# EAGLE board MotorShield-v0.01 (EAGLE 9.6.0)
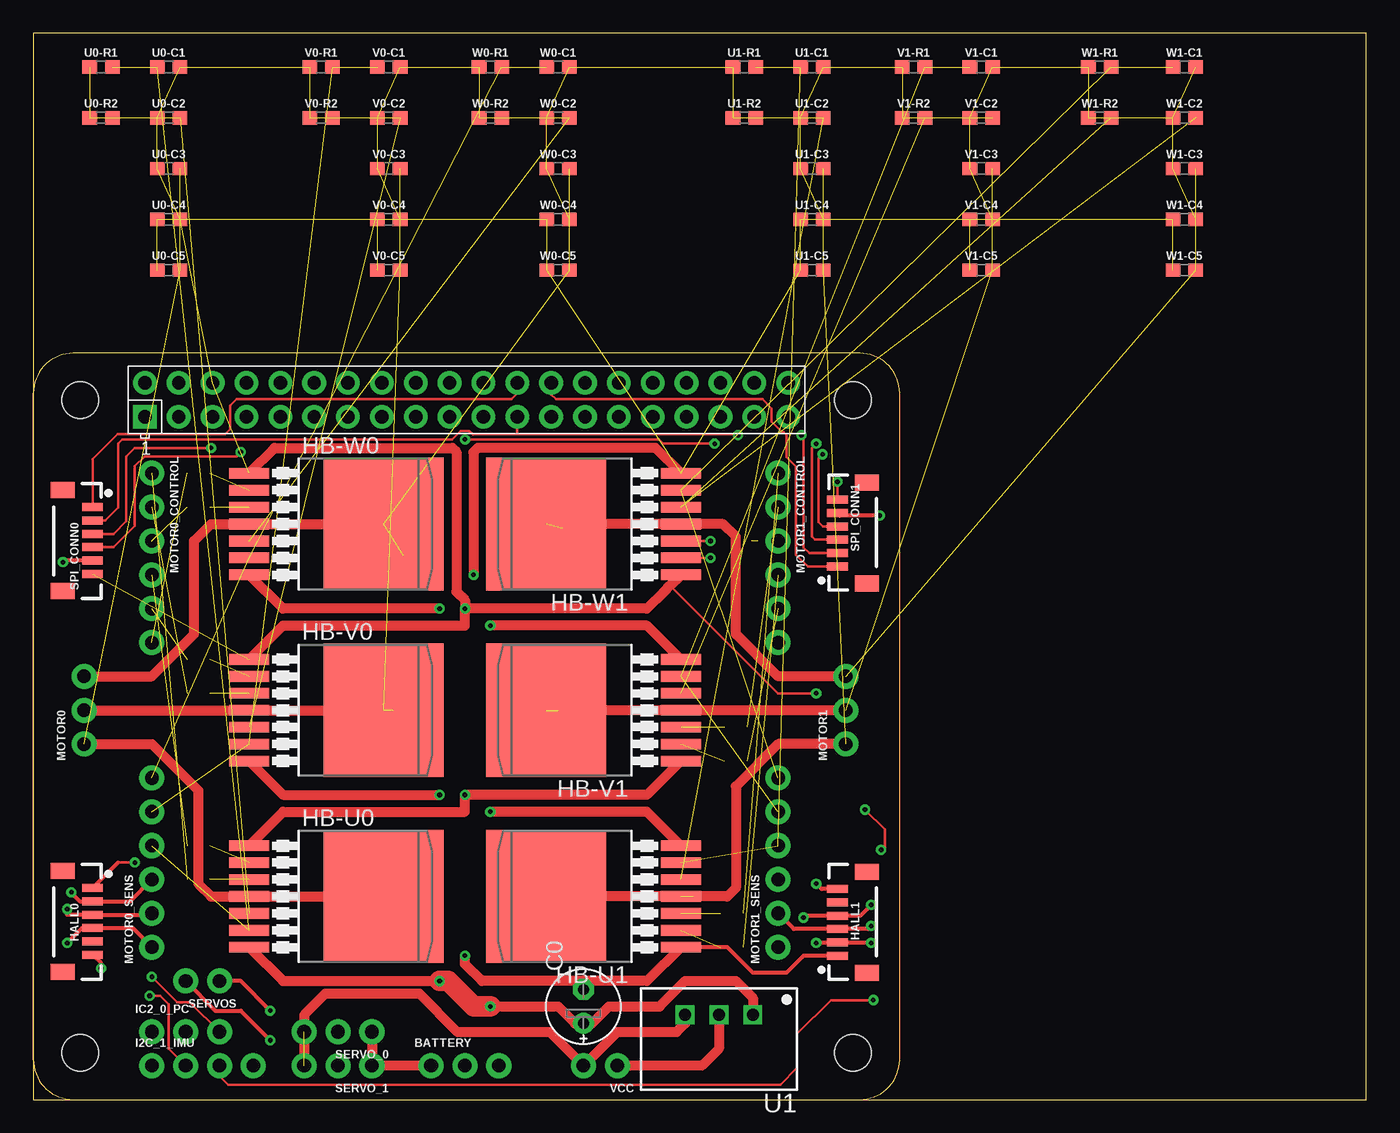
[diagram p0: board, top side]
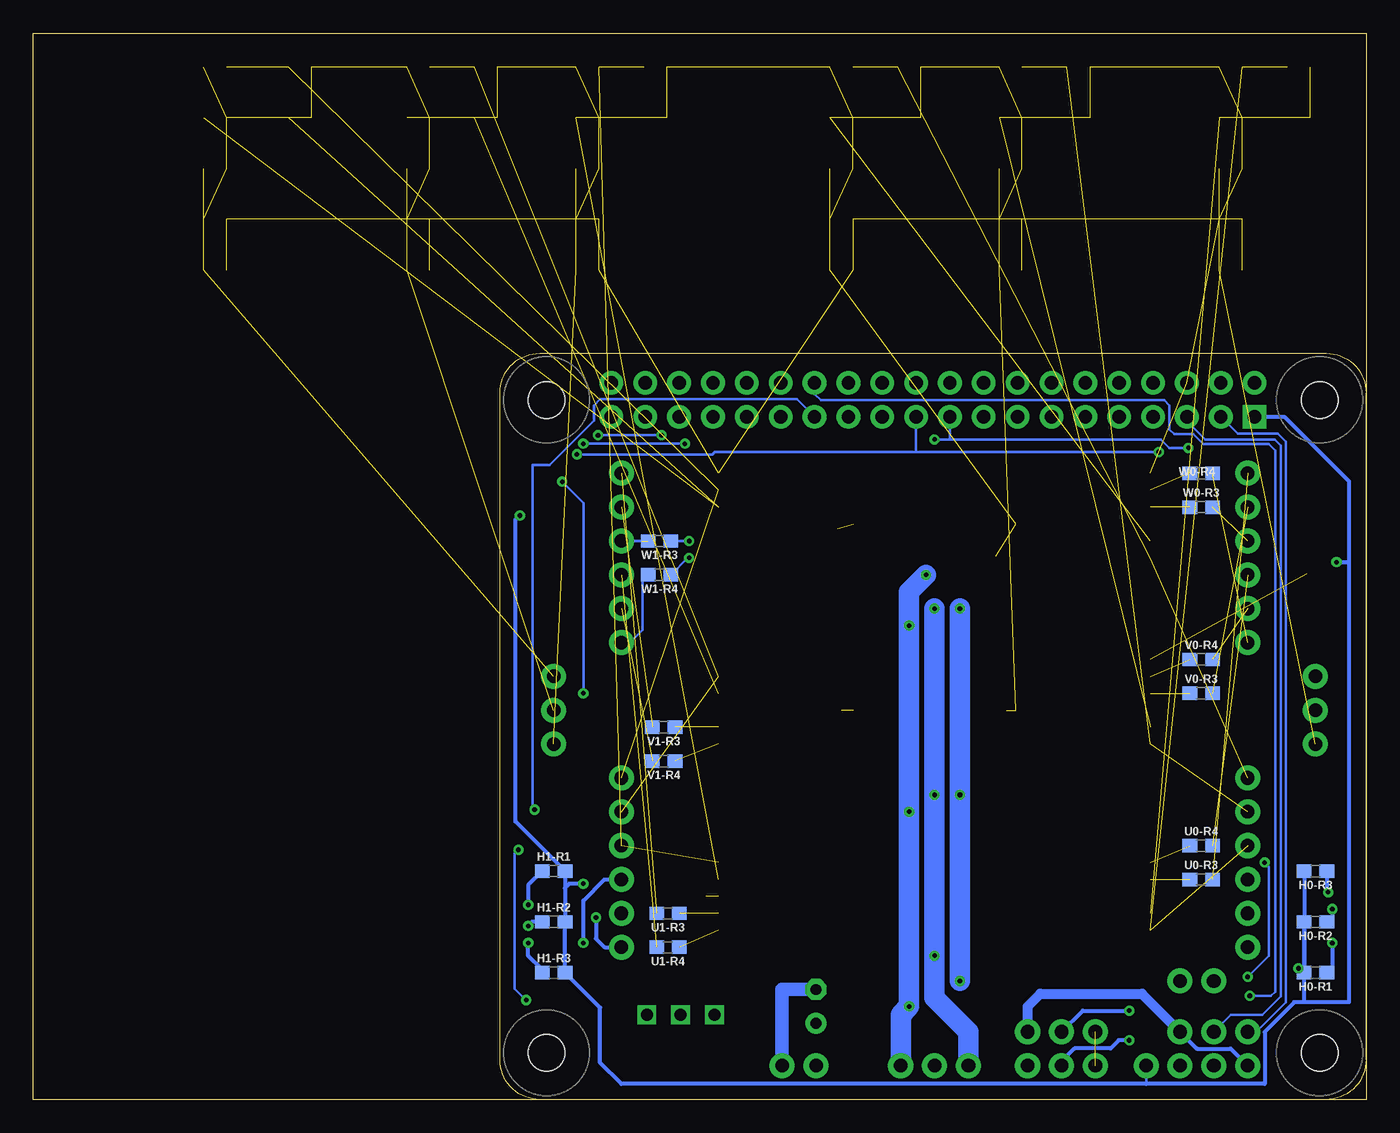
[diagram p1: board, bottom side, seen from below]

Size 100 x 80 mm. Coordinates in mm from the lower left corner, seen from the top.
Outline: 0,0 100,0 100,80 0,80 0,0
Copper layers (1*16): Top 0.035mm / dielectric 1.5mm / Bottom 0.035mm
Design rules "default": minimum track width 6mil, minimum drill 0.35mm, track to track 6mil, track to pad 6mil, pad to pad 6mil, via to via 6mil, smd to smd 6mil, copper to edge 40mil, drill to drill 6mil, minimum pad ring 10mil, minimum via ring 8mil, stop-mask expansion 4mil, vias tented up to drill 0mil, thermal gap 10mil

## Footprints (pad centres in the part's own frame; a part is rotated, then mirrored left to right if it is on the bottom)
1X03_NO_SILK = drill 1.016 pad 1.88: 1 0,0; 2 2.54,0; 3 5.08,0
E2,5-6E = drill 0.813 pad 1.575: + -1.27,0 | drill 0.813 pad 1.575 octagon: - 1.27,0
0603 = smd 1.1 x 1: 1 -0.85,0; 2 0.85,0
1X06-1MM = smd 0.6 x 1.55: 1 -2.54,1.27; 2 -1.54,1.27; 3 -0.54,1.27; 4 0.46,1.27; 5 1.46,1.27; 6 2.46,1.27 | smd 1.2 x 1.8: P$1 -3.84,-0.955; P$2 3.76,-0.955
P-TO263-7-1 = smd 0.8 x 3: 1 -3.81,-9.207; 2 -2.54,-9.207; 3 -1.27,-9.207; 4 0,-9.207; 5 1.27,-9.207; 6 2.54,-9.207; 7 3.81,-9.207 | smd 10 x 9: 8 0,0.895
1X04_NO_SILK = drill 1.016 pad 1.88: 1 0,0; 2 2.54,0; 3 5.08,0; 4 7.62,0
1X06_NO_SILK = drill 1.016 pad 1.88: 1 0,0; 2 2.54,0; 3 5.08,0; 4 7.62,0; 5 10.16,0; 6 12.7,0
1X02_NO_SILK = drill 1.016 pad 1.88: 1 0,0; 2 2.54,0
TSR-1 = drill 0.9 square: 1 -2.54,0; 2 0,0; 3 2.54,0
RASPI_BOARD_B+HAT = drill 1 pad 1.778 square: 1 8.37,51.23 | drill 1 pad 1.778: 2 8.37,53.77; 3 10.91,51.23; 4 10.91,53.77; 5 13.45,51.23; 6 13.45,53.77; 7 15.99,51.23; 8 15.99,53.77; 9 18.53,51.23; 10 18.53,53.77; 11 21.07,51.23; 12 21.07,53.77; 13 23.61,51.23; 14 23.61,53.77; 15 26.15,51.23; 16 26.15,53.77; 17 28.69,51.23; 18 28.69,53.77; 19 31.23,51.23; 20 31.23,53.77; 21 33.77,51.23; 22 33.77,53.77; 23 36.31,51.23; 24 36.31,53.77; 25 38.85,51.23; 26 38.85,53.77; 27 41.39,51.23; 28 41.39,53.77; 29 43.93,51.23; 30 43.93,53.77; 31 46.47,51.23; 32 46.47,53.77; 33 49.01,51.23; 34 49.01,53.77; 35 51.55,51.23; 36 51.55,53.77; 37 54.09,51.23; 38 54.09,53.77; 39 56.63,51.23; 40 56.63,53.77 | hole 2.75: 3.5,3.5; 3.5,52.5; 61.5,3.5; 61.5,52.5

## Placement (x,y rotation side)
BATTERY  [1X03_NO_SILK]  29.84,2.54 0 top
C0  [E2,5-6E]  41.27,6.99 90 top
H0-R1  10k  [0603]  3.81,9.53 180 bottom
H0-R2  10k  [0603]  3.81,13.34 180 bottom
H0-R3  10k  [0603]  3.81,17.14 180 bottom
H1-R1  10k  [0603]  60.96,17.14 0 bottom
H1-R2  10k  [0603]  60.96,13.34 0 bottom
H1-R3  10k  [0603]  60.96,9.53 0 bottom
HALL0  [1X06-1MM]  3.17,13.34 270 top
HALL1  [1X06-1MM]  61.59,13.34 90 top
HB-U0  [P-TO263-7-1]  25.4,15.24 270 top
HB-U1  [P-TO263-7-1]  39.37,15.24 90 top
HB-V0  [P-TO263-7-1]  25.4,29.21 270 top
HB-V1  [P-TO263-7-1]  39.37,29.21 90 top
HB-W0  [P-TO263-7-1]  25.4,43.18 270 top
HB-W1  [P-TO263-7-1]  39.37,43.18 90 top
I2C_1_IMU  JP  [1X04_NO_SILK]  8.89,2.54 0 top
IC2_0_PC  JP  [1X03_NO_SILK]  8.89,5.08 0 top
MOTOR0  JP  [1X03_NO_SILK]  3.81,26.67 90 top
MOTOR0_CONTROL  [1X06_NO_SILK]  8.89,46.99 270 top
MOTOR0_SENS  [1X06_NO_SILK]  8.89,11.43 90 top
MOTOR1  JP  [1X03_NO_SILK]  60.96,26.67 90 top
MOTOR1_CONTROL  [1X06_NO_SILK]  55.88,46.99 270 top
MOTOR1_SENS  [1X06_NO_SILK]  55.88,11.43 90 top
SERVO_0  JP  [1X03_NO_SILK]  25.4,5.08 180 top
SERVO_1  JP  [1X03_NO_SILK]  25.4,2.54 180 top
SERVOS  [1X02_NO_SILK]  13.97,8.89 180 top
SPI_CONN0  ENCODER0  [1X06-1MM]  3.17,41.91 270 top
SPI_CONN1  ENCODER1  [1X06-1MM]  61.59,42.55 90 top
U0-C1  0.1uF  [0603]  10.16,77.47 0 top
U0-C2  1nF  [0603]  10.16,73.66 0 top
U0-C3  0.22uF  [0603]  10.16,69.85 0 top
U0-C4  0.1uF  [0603]  10.16,66.04 0 top
U0-C5  0.22uF  [0603]  10.16,62.23 0 top
U0-R1  4.7k  [0603]  5.08,77.47 0 top
U0-R2  47k  [0603]  5.08,73.66 0 top
U0-R3  10k  [0603]  12.38,16.51 0 bottom
U0-R4  10k  [0603]  12.38,19.05 0 bottom
U1  TSR_1-2450  [TSR-1]  51.44,6.35 180 top
U1-C1  0.1uF  [0603]  58.42,77.47 0 top
U1-C2  1nF  [0603]  58.42,73.66 0 top
U1-C3  0.22uF  [0603]  58.42,69.85 0 top
U1-C4  0.1uF  [0603]  58.42,66.04 0 top
U1-C5  0.22uF  [0603]  58.42,62.23 0 top
U1-R1  4.7k  [0603]  53.34,77.47 0 top
U1-R2  47k  [0603]  53.34,73.66 0 top
U1-R3  10k  [0603]  52.39,13.97 180 bottom
U1-R4  10k  [0603]  52.39,11.43 180 bottom
V0-C1  0.1uF  [0603]  26.67,77.47 0 top
V0-C2  1nF  [0603]  26.67,73.66 0 top
V0-C3  0.22uF  [0603]  26.67,69.85 0 top
V0-C4  0.1uF  [0603]  26.67,66.04 0 top
V0-C5  0.22uF  [0603]  26.67,62.23 0 top
V0-R1  4.7k  [0603]  21.59,77.47 0 top
V0-R2  47k  [0603]  21.59,73.66 0 top
V0-R3  10k  [0603]  12.38,30.48 0 bottom
V0-R4  10k  [0603]  12.38,33.02 0 bottom
V1-C1  0.1uF  [0603]  71.12,77.47 0 top
V1-C2  1nF  [0603]  71.12,73.66 0 top
V1-C3  0.22uF  [0603]  71.12,69.85 0 top
V1-C4  0.1uF  [0603]  71.12,66.04 0 top
V1-C5  0.22uF  [0603]  71.12,62.23 0 top
V1-R1  4.7k  [0603]  66.04,77.47 0 top
V1-R2  47k  [0603]  66.04,73.66 0 top
V1-R3  10k  [0603]  52.7,27.94 180 bottom
V1-R4  10k  [0603]  52.7,25.4 180 bottom
VCC  [1X02_NO_SILK]  43.81,2.54 180 top
W0-C1  0.1uF  [0603]  39.37,77.47 0 top
W0-C2  1nF  [0603]  39.37,73.66 0 top
W0-C3  0.22uF  [0603]  39.37,69.85 0 top
W0-C4  0.1uF  [0603]  39.37,66.04 0 top
W0-C5  0.22uF  [0603]  39.37,62.23 0 top
W0-R1  4.7k  [0603]  34.29,77.47 0 top
W0-R2  47k  [0603]  34.29,73.66 0 top
W0-R3  10k  [0603]  12.38,44.45 0 bottom
W0-R4  10k  [0603]  12.38,46.99 0 bottom
W1-C1  0.1uF  [0603]  86.36,77.47 0 top
W1-C2  1nF  [0603]  86.36,73.66 0 top
W1-C3  0.22uF  [0603]  86.36,69.85 0 top
W1-C4  0.1uF  [0603]  86.36,66.04 0 top
W1-C5  0.22uF  [0603]  86.36,62.23 0 top
W1-R1  4.7k  [0603]  80.01,77.47 0 top
W1-R2  47k  [0603]  80.01,73.66 0 top
W1-R3  10k  [0603]  53.02,41.91 180 bottom
W1-R4  10k  [0603]  53.02,39.37 180 bottom
X1  RASPI_BOARD_B+_H  [RASPI_BOARD_B+HAT]  0,0 0 top

## Library data of the parts
BATTERY IC2_0_PC MOTOR0 MOTOR0_CONTROL MOTOR0_SENS MOTOR1 MOTOR1_CONTROL MOTOR1_SENS SERVO_0 SERVO_1 SERVOS VCC = SparkFun-Connectors
C0 = rcl; SPICEPREFIX: C
H0-R1-H0-R3 H1-R1-H1-R3 U0-R3 U0-R4 U1-R3 U1-R4 V0-R3 V0-R4 V1-R3 V1-R4 W0-R3 W0-R4 W1-R3 W1-R4 = SparkFun-Resistors; PROD_ID: RES-00824
HALL0 HALL1 SPI_CONN0 SPI_CONN1 = SparkFun-Connectors; PROD_ID: CONN-08249; SF_ID: GPS-00579
HB-U0 HB-U1 HB-V0 HB-V1 HB-W0 HB-W1 = ITX007T
I2C_1_IMU = SparkFun-Connectors; PROD_ID: CONN-09696
U0-C1 U0-C4 U1-C1 U1-C4 V0-C1 V0-C4 V1-C1 V1-C4 W0-C1 W0-C4 W1-C1 W1-C4 = SparkFun-Capacitors; PROD_ID: CAP-08604
U0-C2 U1-C2 V0-C2 V1-C2 W0-C2 W1-C2 = SparkFun-Capacitors; PROD_ID: CAP-07886
U0-C3 U0-C5 U1-C3 U1-C5 V0-C3 V0-C5 V1-C3 V1-C5 W0-C3 W0-C5 W1-C3 W1-C5 = SparkFun-Capacitors; PROD_ID: CAP-07822
U0-R1 U1-R1 V0-R1 V1-R1 W0-R1 W1-R1 = SparkFun-Resistors; PROD_ID: RES-07857
U0-R2 U1-R2 V0-R2 V1-R2 W0-R2 W1-R2 = SparkFun-Resistors; PROD_ID: RES-07871
U1 = _traco_tsr-1
X1 = raspberrypi_bastelstube_v13

## Nets
3.3V: H0-R1.2 H0-R2.2 H0-R3.2 H1-R1.2 H1-R2.2 H1-R3.2 HALL0.6 HALL1.6 I2C_1_IMU.4 SPI_CONN0.5 SPI_CONN1.5 X1.1
5V0: X1.2
GND: BATTERY.1 C0.- HALL0.1 HALL1.1 HB-U0.1 HB-U1.1 HB-V0.1 HB-V1.1 HB-W0.1 HB-W1.1 I2C_1_IMU.1 IC2_0_PC.3 SERVO_0.1 SERVO_1.1 SPI_CONN0.6 SPI_CONN1.6 U0-C1.2 U0-C2.1 U0-C3.1 U0-C4.2 U0-R1.1 U0-R2.1 U1-C1.2 U1-C2.1 U1-C3.1 U1-C4.2 U1-R1.1 U1-R2.1 U1.2 V0-C1.2 V0-C2.1 V0-C3.1 V0-C4.2 V0-R1.1 V0-R2.1 V1-C1.2 V1-C2.1 V1-C3.1 V1-C4.2 V1-R1.1 V1-R2.1 VCC.1 W0-C1.2 W0-C2.1 W0-C3.1 W0-C4.2 W0-R1.1 W0-R2.1 W1-C1.2 W1-C2.1 W1-C3.1 W1-C4.2 W1-R1.1 W1-R2.1 X1.6
HALL_U0: H0-R1.1 HALL0.4 MOTOR0_SENS.1
HALL_U1: H1-R1.1 HALL1.4 MOTOR1_SENS.1
HALL_V0: H0-R2.1 HALL0.3 MOTOR0_SENS.2
HALL_V1: H1-R2.1 HALL1.3 MOTOR1_SENS.2
HALL_W0: H0-R3.1 HALL0.2 MOTOR0_SENS.3
HALL_W1: H1-R3.1 HALL1.2 MOTOR1_SENS.3
I2C0_SCL: IC2_0_PC.2 X1.5
I2C0_SDA: IC2_0_PC.1 X1.3
I2C1_SCL: I2C_1_IMU.2 X1.28
I2C1_SDA: I2C_1_IMU.3 X1.27
IN_U0: MOTOR0_CONTROL.4 U0-R4.2
IN_U1: MOTOR1_CONTROL.4 U1-R4.2
IN_V0: MOTOR0_CONTROL.5 V0-R4.2
IN_V1: MOTOR1_CONTROL.5 V1-R4.2
IN_W0: MOTOR0_CONTROL.6 W0-R4.2
IN_W1: MOTOR1_CONTROL.6 W1-R4.2
INH_U0: MOTOR0_CONTROL.1 U0-R3.2
INH_U1: MOTOR1_CONTROL.1 U1-R3.2
INH_V0: MOTOR0_CONTROL.2 V0-R3.2
INH_V1: MOTOR1_CONTROL.2 V1-R3.2
INH_W0: MOTOR0_CONTROL.3 W0-R3.2
INH_W1: MOTOR1_CONTROL.3 W1-R3.2
IS_U0: HB-U0.6 MOTOR0_SENS.4 U0-C1.1 U0-R1.2
IS_U1: HB-U1.6 MOTOR1_SENS.4 U1-C1.1 U1-R1.2
IS_V0: HB-V0.6 MOTOR0_SENS.5 V0-C1.1 V0-R1.2
IS_V1: HB-V1.6 MOTOR1_SENS.5 V1-C1.1 V1-R1.2
IS_W0: HB-W0.6 MOTOR0_SENS.6 W0-C1.1 W0-R1.2
IS_W1: HB-W1.6 MOTOR1_SENS.6 W1-C1.1 W1-R1.2
N$1: HB-W0.3 W0-R3.1
N$2: HB-V0.5 V0-C2.2 V0-R2.2
N$3: HB-W0.5 W0-C2.2 W0-R2.2
N$10: HB-U0.5 U0-C2.2 U0-R2.2
N$11: HB-U0.3 U0-R3.1
N$14: HB-U0.2 U0-R4.1
N$17: HB-U1.3 U1-R3.1
N$18: HB-V0.3 V0-R3.1
N$19: HB-U1.2 U1-R4.1
N$20: HB-W0.2 W0-R4.1
N$23: HB-U1.5 U1-C2.2 U1-R2.2
N$24: HB-V0.2 V0-R4.1
N$26: HB-V1.3 V1-R3.1
N$27: HB-V1.2 V1-R4.1
N$29: HB-V1.5 V1-C2.2 V1-R2.2
N$30: HB-W1.3 W1-R3.1
N$31: HB-W1.2 W1-R4.1
N$33: HB-W1.5 W1-C2.2 W1-R2.2
SERVO_0: SERVO_0.2 SERVOS.1
SERVO_1: SERVO_1.2 SERVOS.2
SPI_CS0: SPI_CONN0.1 X1.24
SPI_CS1: SPI_CONN1.1 X1.26
SPI_MISO: SPI_CONN0.4 SPI_CONN1.4 X1.21
SPI_MOSI: SPI_CONN0.3 SPI_CONN1.3 X1.19
SPI_SCLK: SPI_CONN0.2 SPI_CONN1.2 X1.23
U0: HB-U0.4 HB-U0.8 MOTOR0.1 U0-C3.2 U0-C5.2
U1: HB-U1.4 HB-U1.8 MOTOR1.1 U1-C3.2 U1-C5.2
V0: HB-V0.4 HB-V0.8 MOTOR0.2 V0-C3.2 V0-C5.2
V1: HB-V1.4 HB-V1.8 MOTOR1.2 V1-C3.2 V1-C5.2
VCC: SERVO_0.3 SERVO_1.3 U1.3 VCC.2
VI: BATTERY.3 C0.+ HB-U0.7 HB-U1.7 HB-V0.7 HB-V1.7 HB-W0.7 HB-W1.7 U0-C4.1 U0-C5.1 U1-C4.1 U1-C5.1 U1.1 V0-C4.1 V0-C5.1 V1-C4.1 V1-C5.1 W0-C4.1 W0-C5.1 W1-C4.1 W1-C5.1
W0: HB-W0.4 HB-W0.8 MOTOR0.3 W0-C3.2 W0-C5.2
W1: HB-W1.4 HB-W1.8 MOTOR1.3 W1-C3.2 W1-C5.2

## Tracks (layer width: path | path; a pad name or v marks a point on that pad's centre or on a via)
3.3V  (via drill 0.35)
  Top 0.305: v63.5,43.81 60.52,43.81 SPI_CONN1.5 | HALL1.6 59.13,15.79 v58.74,16.19 | v5.08,9.84 5.08,10.24 HALL0.6 | SPI_CONN0.5 2.35,40.45 v2.22,40.32
  Bottom 0.203: I2C_1_IMU.4 16.51,1.17
  Bottom 0.305: H0-R1.2 H0-R2.2 | H0-R3.2 H0-R1.2 | 60.11,15.88 H1-R1.2 63.83,20.87 63.83,43.48 v63.5,43.81 | 60.11,15.88 H1-R2.2 H1-R3.2 57.47,6.88 57.47,2.76 55.88,1.17 16.51,1.17 7.62,1.17 7.62,5.08 5.4,7.3 4.76,7.3 | X1.1 6.15,51.23 1.27,46.35 1.27,40.32 | 1.27,40.32 1.27,7.3 4.76,7.3 | v58.74,16.19 59.79,16.19 60.11,15.88 | 4.76,7.3 4.66,7.41 H0-R1.2 | H0-R1.2 4.98,9.84 v5.08,9.84 | v2.22,40.32 1.27,40.32
GND  (via drill 0.35)  (38 unrouted)
  Top 0.203: 6.35,17.78 v7.62,17.78 | IC2_0_PC.3 11.75,7.3 10.79,7.3 v8.89,9.21 | SPI_CONN1.6 v60.33,46.35 | v58.74,30.48 55.88,30.48 47.78,38.58
  Top 0.305: HALL0.1 6.35,17.78 | HALL1.1 57.78,10.79 56.52,9.53 53.98,9.53 52.07,11.43 HB-U1.1
  Top 0.762: HB-W1.1 47.78,38.58 47.31,38.1 46.04,36.83 v32.38,36.83 | HB-V1.1 46.04,22.86 v32.38,22.86 32.38,21.59 18.73,21.59 HB-U0.1 | HB-V0.1 18.73,35.56 32.38,35.56 v32.38,36.83 | HB-W0.1 18.1,48.9 31.43,48.9 31.75,48.58 31.75,38.1 32.38,37.47 v32.38,36.83 | U1.2 51.44,3.81 50.16,2.54 VCC.1 | HB-U1.1 46.04,8.89 41.27,8.89 | 41.27,8.89 33.66,8.89 32.38,10.16 v32.38,10.79 | C0.- 41.27,8.89 | SERVO_0.1 SERVO_1.1 BATTERY.1
  Bottom 0.203: v8.89,9.21 7.3,10.79 7.3,17.46 v7.62,17.78 | v60.33,46.35 58.74,44.77 v58.74,30.48
  Bottom 0.305: IC2_0_PC.3 12.7,3.81 10.16,3.81 I2C_1_IMU.1
  Bottom 0.762: SERVO_0.1 25.4,6.99 24.45,7.94 16.83,7.94 IC2_0_PC.3
  Bottom 1.016: VCC.1 43.81,8.26 C0.-
  Bottom 1.524: BATTERY.1 29.84,5.08 32.38,7.62 v32.38,10.79 v32.38,22.86 v32.38,36.83
HALL_U0  (via drill 0.35)
  Top 0.305: MOTOR0_SENS.1 7.45,12.88 HALL0.4 3.67,12.88 v2.54,11.75
  Bottom 0.305: H0-R1.1 2.54,9.95 v2.54,11.75
HALL_U1  (via drill 0.35)
  Top 0.305: v62.87,14.61 62.05,13.79 HALL1.4 57.78,13.79 v57.78,13.65
  Bottom 0.305: H1-R1.1 62.87,16.09 v62.87,14.61 | v57.78,13.65 57.78,12.06 57.15,11.43 MOTOR1_SENS.1
HALL_V0  (via drill 0.35)
  Top 0.305: MOTOR0_SENS.2 8.79,13.88 HALL0.3 2.54,13.88 v2.54,14.29
  Bottom 0.305: v2.54,14.29 2.54,13.34 H0-R2.1
HALL_V1  (via drill 0.35)
  Top 0.305: v62.87,13.02 62.64,12.79 HALL1.3 57.05,12.79 MOTOR1_SENS.2
  Bottom 0.305: H1-R2.1 62.55,13.34 v62.87,13.02
HALL_W0  (via drill 0.35)
  Top 0.305: MOTOR0_SENS.3 7.25,14.88 HALL0.2 3.49,14.88 2.86,15.51 v2.86,15.56
  Bottom 0.305: H0-R3.1 2.96,15.66 v2.86,15.56
HALL_W1  (via drill 0.35)
  Top 0.305: v62.87,11.75 60.37,11.75 HALL1.2 60.28,11.75 v58.74,11.75
  Bottom 0.305: H1-R3.1 61.81,9.74 62.87,10.79 v62.87,11.75 | v58.74,11.75 58.74,14.92 57.15,16.51 MOTOR1_SENS.3
I2C0_SCL
  Bottom 0.203: IC2_0_PC.2 10.16,6.35 7.78,6.35 6.39,7.74 6.39,49.06 6.86,49.53 12.06,49.53 13.45,50.91 X1.5
I2C0_SDA
  Bottom 0.203: IC2_0_PC.1 8.26,5.08 6.03,7.3 6.03,49.37 6.62,49.96 9.64,49.96 X1.3
I2C1_SCL  (via drill 0.35)
  Top 0.203: I2C_1_IMU.2 10.16,3.81 10.16,7.14 9.53,7.78 v8.73,7.78
  Bottom 0.203: v8.73,7.78 7.14,7.78 6.83,8.1 6.83,48.68 7.32,49.17 12.21,49.17 12.97,49.93 14.4,49.93 14.75,50.28 14.75,52.06 15.16,52.47 40.91,52.47 41.39,52.95 X1.28
I2C1_SDA  (via drill 0.35)
  Top 0.203: v62.39,21.75 63.88,20.25 63.88,18.73 v63.61,18.73 | v63.02,7.46 59.85,7.46 57.31,4.92 57.31,2.38 56.05,1.12 14.61,1.12 13.97,1.75 I2C_1_IMU.3
  Bottom 0.203: X1.27 42.7,52.54 42.7,52.55 57.47,52.55 57.94,52.07 57.94,50.96 61.28,47.62 62.55,47.62 62.55,21.75 v62.39,21.75 | v63.61,18.73 63.88,18.46 63.88,8.32 v63.02,7.46
IN_U0  (1 unrouted)
IN_U1  (1 unrouted)
IN_V0  (1 unrouted)
IN_V1  (1 unrouted)
IN_W0  (1 unrouted)
IN_W1
  Bottom 0.203: W1-R4.2 54.29,38.95 54.29,35.24 55.24,34.29 MOTOR1_CONTROL.6
INH_U0  (1 unrouted)
INH_U1  (1 unrouted)
INH_V0  (1 unrouted)
INH_V1  (1 unrouted)
INH_W0  (1 unrouted)
INH_W1  (1 unrouted)
  Bottom 0.203: MOTOR1_CONTROL.3 54.36,41.91
IS_U0  (3 unrouted)
IS_U1  (3 unrouted)
IS_V0  (3 unrouted)
IS_V1  (3 unrouted)
IS_W0  (3 unrouted)
IS_W1  (3 unrouted)
N$1  (1 unrouted)
N$2  (2 unrouted)
N$3  (2 unrouted)
N$10  (2 unrouted)
N$11  (1 unrouted)
N$14  (1 unrouted)
N$17  (1 unrouted)
N$18  (1 unrouted)
N$19  (1 unrouted)
N$20  (1 unrouted)
N$23  (2 unrouted)
N$24  (1 unrouted)
N$26  (1 unrouted)
N$27  (1 unrouted)
N$29  (2 unrouted)
N$30  (via drill 0.35)
  Top 0.203: HB-W1.3 v50.8,41.91
  Bottom 0.203: v50.8,41.91 W1-R3.1
N$31  (via drill 0.35)
  Top 0.203: v50.8,40.64 HB-W1.2
  Bottom 0.203: W1-R4.1 50.9,40.64 v50.8,40.64
N$33  (2 unrouted)
SERVO_0  (via drill 0.35)
  Top 0.305: v17.78,6.67 15.56,8.89 SERVOS.1
  Bottom 0.305: SERVO_0.2 21.27,6.67 v17.78,6.67
SERVO_1  (via drill 0.35)
  Top 0.305: SERVOS.2 13.65,6.67 15.56,6.67 v17.78,4.45
  Bottom 0.305: v17.78,4.45 18.56,4.45 19.17,3.83 21.88,3.83 22.86,2.86 SERVO_1.2
SPI_CS0
  Top 0.203: X1.24 36.31,52.98 35.88,52.55 15.24,52.55 14.76,52.07 14.76,50.29 14.4,49.93 6.33,49.93 4.45,48.05 4.45,47.95 4.45,47.94 SPI_CONN0.1
SPI_CS1
  Top 0.203: SPI_CONN1.1 58.1,40.01 57.23,40.88 57.23,47.48 56.52,48.2 56.52,49.85 56.28,50.09 56.16,50.09 55.39,50.85 55.39,51.86 54.71,52.55 39.21,52.55 38.85,52.91 X1.26
  Top 0.305: SPI_CONN1.1 60.25,40.08 59.74,40.08
SPI_MISO  (via drill 0.35)
  Top 0.203: v15.56,48.58 15.24,48.26 8.36,48.26 7.62,47.52 7.62,43.04 6.03,41.45 SPI_CONN0.4 | 60.15,43.18 SPI_CONN1.4 59.23,43.01 58.9,43.34 58.9,48.1 v59.21,48.42 v59.22,48.41
  Bottom 0.203: v15.56,48.58 33.66,48.58 | X1.21 33.77,48.69 33.66,48.58 | 33.66,48.58 48.9,48.58 49.06,48.41 v59.22,48.41
SPI_MOSI  (via drill 0.35)
  Top 0.203: v13.34,48.9 7.62,48.9 6.99,48.26 6.99,43.4 6.03,42.45 SPI_CONN0.3 | SPI_CONN1.3 58.64,42.01 58.42,42.23 58.42,48.9 v58.74,49.21 | v51.12,49.21 47.25,49.21 46.94,49.53 v32.38,49.53
  Bottom 0.203: v13.34,48.9 14.76,48.9 15.4,49.53 31.27,49.53 | 31.27,49.53 v32.38,49.53 | v58.74,49.21 v51.12,49.21 | X1.19 31.23,49.57 31.27,49.53
SPI_SCLK  (via drill 0.35)
  Top 0.203: SPI_CONN0.2 5.4,43.45 6.35,44.4 6.35,49.21 6.67,49.53 31.43,49.53 32.07,50.16 32.7,50.16 32.94,49.93 | 32.94,49.93 32.98,49.89 | SPI_CONN1.2 58.21,41.01 57.78,41.43 57.78,49.69 v57.63,49.85 | 32.94,49.93 36.2,49.93 | 36.2,49.93 52.78,49.93 v52.86,49.85 | X1.23 36.31,50.04 36.2,49.93
  Bottom 0.203: v52.86,49.85 v57.63,49.85
U0  (2 unrouted)
  Top 0.762: MOTOR0.1 8.89,26.67 12.38,23.18 12.38,16.19 13.34,15.24 HB-U0.4 HB-U0.8
U1  (3 unrouted)
  Top 0.762: MOTOR1.1 55.88,26.67 52.7,23.5 52.7,15.88 52.07,15.24 49.53,15.24 | HB-U1.4 HB-U1.8
V0  (3 unrouted)
  Top 0.762: MOTOR0.2 HB-V0.4 26.99,29.21
V1  (3 unrouted)
  Top 0.762: MOTOR1.2 HB-V1.4 39.37,29.21
VCC  (1 unrouted)
  Top 0.762: U1.3 48.9,5.71 48.26,5.08 43.81,5.08 VCC.2 38.76,5.05 31.85,5.05 28.97,7.94 21.91,7.94 20.32,6.35 SERVO_1.3
VI  (via drill 0.35)  (12 unrouted)
  Top 0.762: v30.48,36.83 18.73,36.83 HB-W0.7 | HB-V1.7 46.04,35.56 v34.29,35.56 | HB-U1.7 46.04,21.59 v34.29,21.59 | HB-U0.7 18.73,8.89 v30.48,8.89 | HB-V0.7 18.73,22.86 v30.48,22.86 | HB-W1.7 46.67,48.9 33.34,48.9 33.02,48.58 v33.02,39.37 | U1.1 53.98,7.62 52.7,8.89 48.9,8.89 46.99,6.99 43.18,6.99 41.91,5.71 C0.+ 40.64,5.71 39.37,6.99 v34.29,6.99
  Top 1.524: v30.48,8.89 31.11,8.89 33.02,6.99 v34.29,6.99
  Bottom 1.524: v30.48,8.89 v30.48,22.86 v30.48,36.83 | v33.02,39.37 34.29,38.1 v34.29,35.56 v34.29,21.59 v34.29,6.99 34.92,6.35 BATTERY.3
W0  (3 unrouted)
  Top 0.762: MOTOR0.3 8.89,31.75 12.06,34.92 12.06,41.91 13.34,43.18 HB-W0.4 24.77,43.18 25.08,43.5 27.78,40.8
W1  (3 unrouted)
  Top 0.762: MOTOR1.3 55.88,31.75 52.7,34.92 52.7,42.23 51.75,43.18 HB-W1.4 40.01,43.18 39.69,42.86